# Altium PCB 51单片机密码锁.PcbDoc
Units mm, origin at the board's own origin, x right, y up, seen from the top; angles counter-clockwise.
Board outline 129.41 x 96.52 mm, 2 copper layers (Top Layer, Bottom Layer); 41 components, 45 nets, 193 pads, 0 vias.
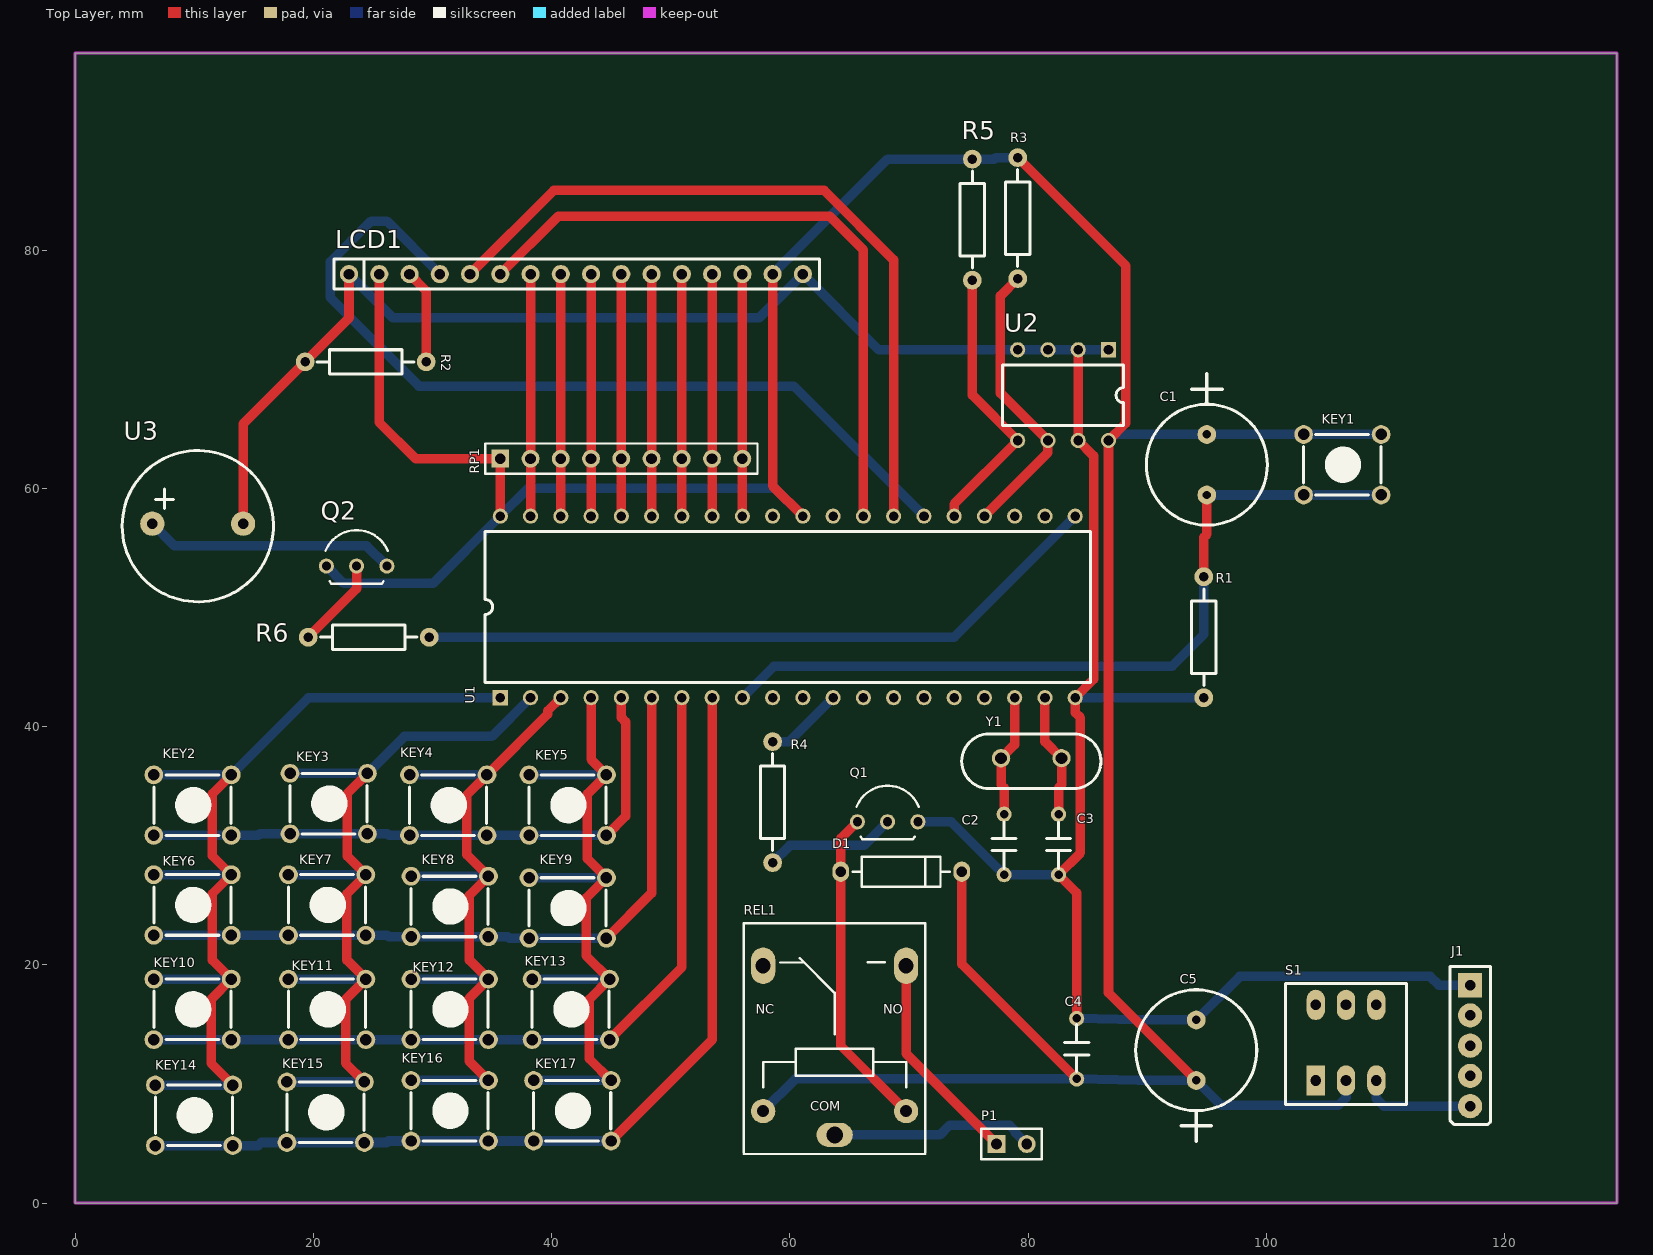
[diagram p0: Top Layer view]
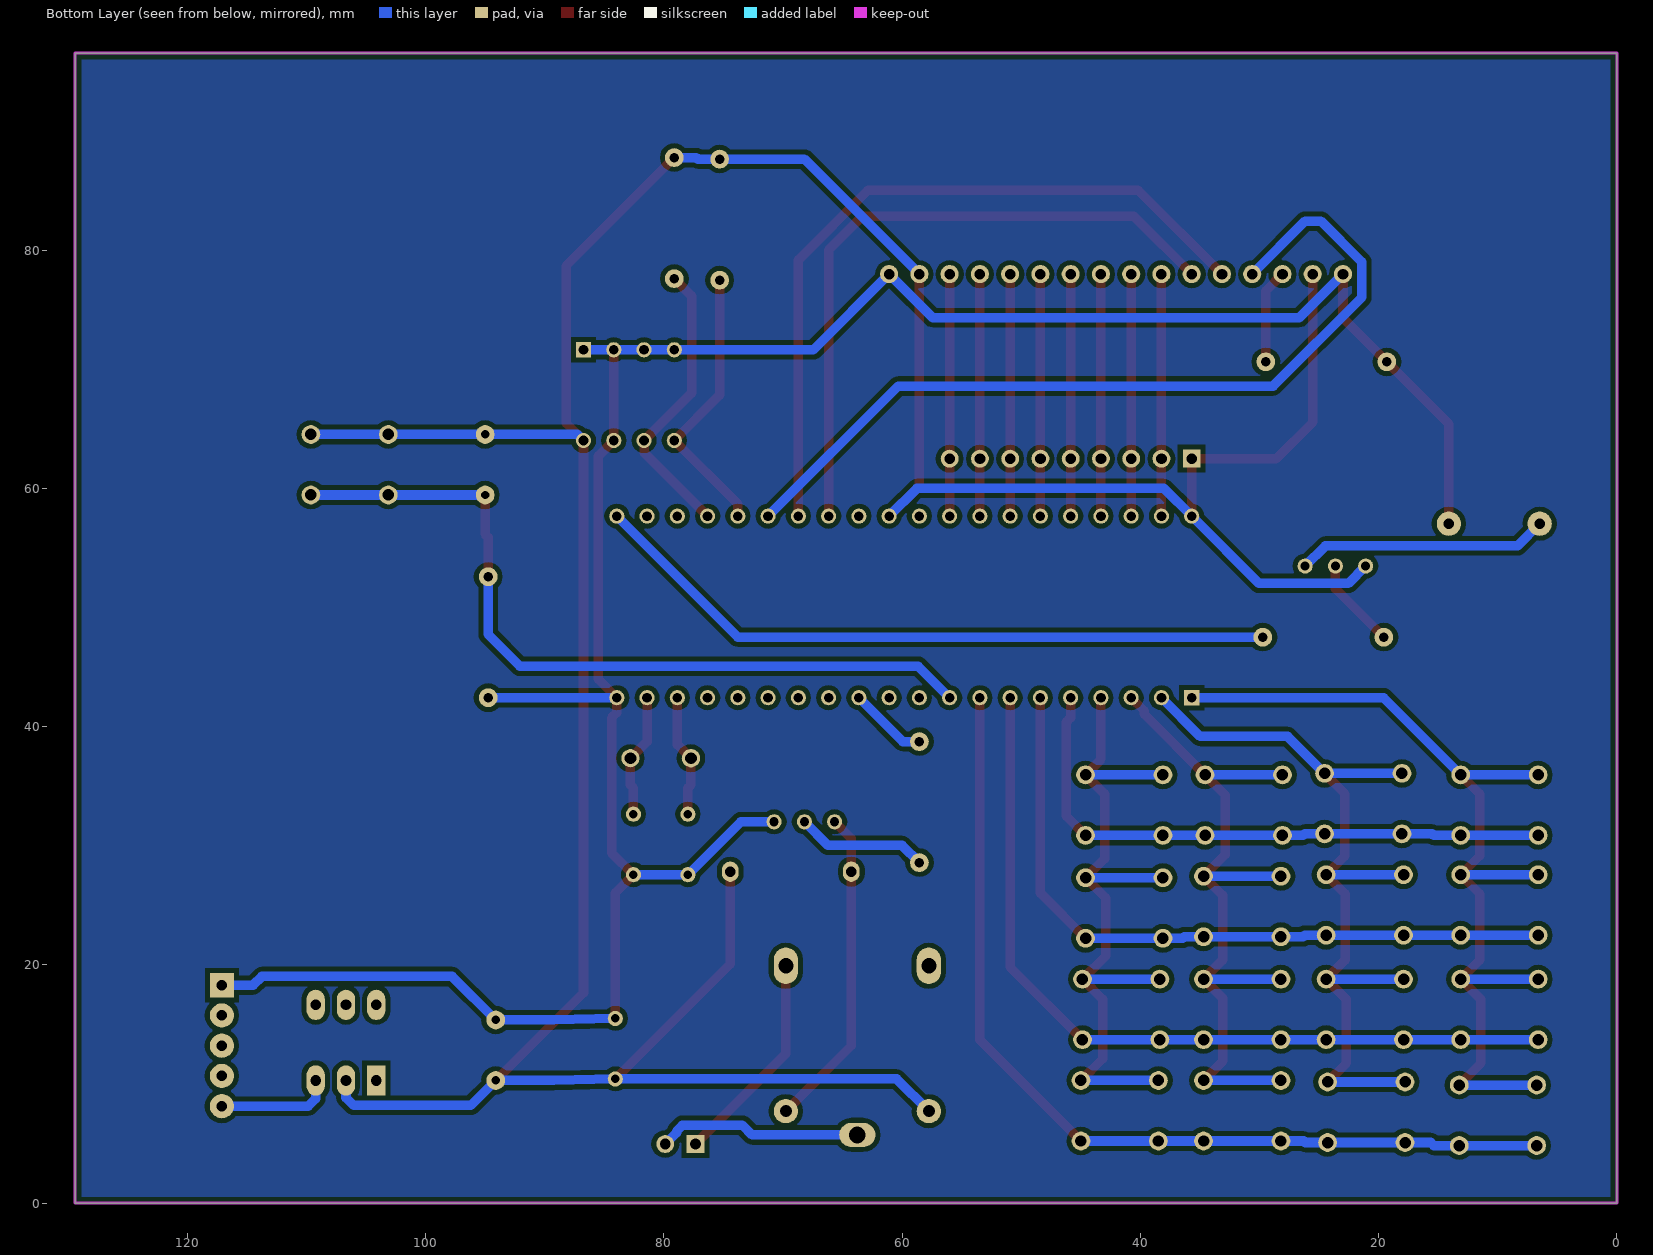
[diagram p1: Bottom Layer view, seen from below]

## Layer stack, top to bottom
Top Layer: signal copper 0.0356
Dielectric: dielectric 0.32, FR-4, Dk 4.8
Bottom Layer: signal copper 0.0356

## Board outline
0,96.524 0,0 129.413,0 129.413,96.524 0,96.524

## Design rules (kind name [scope] priority, off if disabled: settings)
Clearance [All] p1: gap=0.4
PolygonConnect [All] p1: connectstyle=Relief reliefconductorwidth=0.254 reliefentries=4 polygonreliefangle="90 Angle"
RoutingVias [All] p1: holewidth=0.711 width=1.27 viastyle="Through Hole" minholewidth=0.711 minwidth=1.27 maxholewidth=0.711 maxwidth=1.27
SilkscreenOverComponentPads [All] p1: minsilkscreentomaskgap=0.254
SolderMaskExpansion [All] p1: expansion=0.102
Width [All] p1: maxlimit=0.8 minlimit=0.8 preferedwidth=0.8 minimp=50.000000 maximp=50.000000 favimp=50.000000
27 further rules are at their usual default settings.

## Components (designator, comment, footprint, x,y, rotation, side; value= is the part's Value field where it differs from the comment)
C1 "10uF" RB.2/.4 94.996,64.516 r90 top
C2 "30pF" C0.2 77.978,27.559 r90 top
C3 "30pF" C0.2 82.55,27.559 r90 top
C4 "100pF" C0.2 84.074,15.494 r270 top
C5 "100uf" RB.2/.4 94.107,10.287 r270 top
D1 "Diode" DIODE-0.4 64.135,27.94 r0 top
J1 "5P(USB转DIP，供电5V)" 5P 117.094,13.208 r0 top
KEY1 "KEY" KEY 103.124,64.516 r0 top
KEY2 "KEY" KEY 6.604,35.941 r0 top
KEY3 "KEY" KEY 18.034,36.068 r0 top
KEY4 "KEY" KEY 28.067,35.941 r0 top
KEY5 "KEY" KEY 38.1,35.941 r0 top
KEY6 "KEY" KEY 6.604,27.559 r0 top
KEY7 "KEY" KEY 17.907,27.559 r0 top
KEY8 "KEY" KEY 28.194,27.432 r0 top
KEY9 "KEY" KEY 38.1,27.305 r0 top
KEY10 "KEY" KEY 6.604,18.796 r0 top
KEY11 "KEY" KEY 17.907,18.796 r0 top
KEY12 "KEY" KEY 28.194,18.796 r0 top
KEY13 "KEY" KEY 38.354,18.796 r0 top
KEY14 "KEY" KEY 6.731,9.906 r0 top
KEY15 "KEY" KEY 17.78,10.16 r0 top
KEY16 "KEY" KEY 28.194,10.287 r0 top
KEY17 "KEY" KEY 38.481,10.287 r0 top
LCD1 "LCD1602" SIP16 22.987,77.978 r0 top
P1 "Header 2" HDR2X1_A 77.343,4.953 r0 top
Q1 "S8550" TO-92A 68.199,32.004 r0 top
Q2 "S8550" TO-92A 23.622,53.467 r0 top
R1 "5.1k" AXIAL0.4 94.742,42.418 r90 top
R2 "3.3k" AXIAL0.4 19.304,70.612 r0 top
R3 "5.1k" AXIAL0.4 79.121,77.597 r90 top
R4 "100r" AXIAL0.4 58.547,38.735 r270 top
R5 "5.1k" AXIAL0.4 75.311,77.47 r90 top
R6 "100" AXIAL0.4 29.718,47.498 r180 top
REL1 "JQC-3FF" JQC-3FF-1 63.754,5.715 r0 top
RP1 "4.7k(排阻)" SIP9 35.687,62.484 r0 top
S1 "SW4-DIP(自锁开关)" SW6 102.489,8.636 r90 top
U1 "STC89C52" DIP40 35.687,42.418 r90 top
U2 "24CXX" DIP8 86.741,71.628 r270 top
U3 "BELL" BELL 10.287,57.023 r0 top
Y1 "11.0592Mhz" CRYSTAL 82.804,37.338 r180 top

## Footprints (in the part's own frame and the unit in brackets; to place one, negate y for a bottom-side part, rotate by r counter-clockwise, add the part's x,y. Pads: shape width x height; smd on the part's side, far side on the other; paste and mask are expansions set on the pad)
5P [mil]
  rect 80x80 hole 35: 1(0,200)
  round 80 hole 35: 2(0,100) 3(0,0) 4(0,-100) 5(0,-200)
  silkscreen extent -67,-261 68,262
AXIAL0.4 [mil]
  round 62 hole 32: 1(0,0) 2(400,0)
  silkscreen extent 40,-40 360,40
BELL [mil]
  round 80 hole 35 unplated: 1(-150,0) 2(150,0)
  silkscreen extent -250,-258 250,242
C0.2 [mil]
  round 50 hole 28: 1(0,0) 2(200,0)
  silkscreen extent 20,-40 175,40
CRYSTAL [mm]
  round 1.524 hole 1: 1(0,0)
  round 1.542 hole 1: 2(5.08,0)
  silkscreen extent -3.3,-2.03 8.38,2.54
DIODE-0.4 [mm]
  oval 1.4x1.7 hole 0.85: 1(0.127,-0.127) 2(10.287,-0.127)
  silkscreen extent 1.14,-1.4 9.27,1.14
DIP8 [mil]
  rect 50x50 hole 32: 1(0,0)
  round 50 hole 32: 2(0,-100) 3(0,-200) 4(0,-300) 5(300,-300) 6(300,-200) 7(300,-100) 8(300,0)
  silkscreen extent 50,-350 250,50
DIP40 [mil]
  rect 50x50 hole 32: 1(0,0)
  round 50 hole 32: 2(0,-100) 3(0,-200) 4(0,-300) 5(0,-400) 6(0,-500) 7(0,-600) 8(0,-700) 9(0,-800) 10(0,-900) 11(0,-1000) 12(0,-1100) 13(0,-1200) 14(0,-1300) 15(0,-1400) 16(0,-1500) 17(0,-1600) 18(0,-1700) 19(0,-1800) 20(0,-1900) 21(600,-1900) 22(600,-1800) 23(600,-1700) 24(600,-1600) 25(600,-1500) 26(600,-1400) 27(600,-1300) 28(600,-1200) 29(600,-1100) 30(600,-1000) 31(600,-900) 32(600,-800) 33(600,-700) 34(600,-600) 35(600,-500) 36(600,-400) 37(600,-300) 38(600,-200) 39(600,-100) 40(600,0)
  silkscreen extent 50,-1950 550,50
HDR2X1_A [mm]
  rect 1.5x1.5 hole 0.9: 1(0,0)
  round 1.5 hole 0.9: 2(2.54,0)
  silkscreen extent -1.27,-1.27 3.81,1.27
JQC-3FF-1 [mil]
  round 80 hole 40: 1(236.22,78.74) 2(-236.22,78.74)
  oval 120x80 hole 55: 3(0,0)
  oval 80x120 hole 50: 4(236.22,559.05) 5(-236.22,559.05)
  silkscreen extent -300,-63 300,700
KEY [mil]
  round 62 hole 38: 1(0,0) 1(255.91,0) 2(0,-200) 2(255.91,-200)
  silkscreen extent 0,-200 255,0
RB.2/.4 [mil]
  round 62 hole 28: 1(0,0) 2(-200,0)
  silkscreen extent -300,-200 200,200
SIP9 [mm]
  rect 1.5x1.5 hole 0.9: 1(0,0)
  round 1.5 hole 0.9: 2(2.54,0) 3(5.08,0) 4(7.62,0) 5(10.16,0) 6(12.7,0) 7(15.24,0) 8(17.78,0) 9(20.32,0)
  silkscreen extent -1.27,-1.27 21.59,1.27
SIP16 [mil]
  round 60 hole 35: 1(0,0) 2(100,0) 3(200,0) 4(300,0) 5(400,0) 6(500,0) 7(600,0) 8(700,0) 9(800,0) 10(900,0) 11(1000,0) 12(1100,0) 13(1200,0) 14(1300,0) 15(1400,0) 16(1500,0)
  silkscreen extent -50,-50 1555,50
SW6 [mil]
  rect 100x60 hole 35: 1(65,-65)
  oval 100x60 hole 35: 2(65,-165) 3(65,-265) 4(315,-265) 5(315,-165) 6(315,-65)
  silkscreen extent -15,-365 385,35
TO-92A [mil]
  round 50 hole 30: 1(-100,0) 2(0,0) 3(100,0)
  silkscreen extent -103,-58 103,119

## Part data
C1 C5: library part CAPPOL
Y1: library part XTAL

## Nets (pads, with @x,y where several pads share a name; then routed paths per layer and width w, separated by ;. In a path a pad name is that pad's centre, name@x,y a point inside that pad or via, vN(x,y) a via of type N, cw(c..) or ccw(c..) an arc to the next point about the centre after c; other vN are vias at no path point)
D0: LCD1.7 RP1.2 U1.39 | length 20.3
  Top Layer w0.8: U1.39 RP1.2 LCD1.7
D1: LCD1.8 RP1.3 U1.38 | length 20.3
  Top Layer w0.8: U1.38 RP1.3 LCD1.8
D2: LCD1.9 RP1.4 U1.37 | length 20.3
  Top Layer w0.8: U1.37 RP1.4 LCD1.9
D3: LCD1.10 RP1.5 U1.36 | length 20.3
  Top Layer w0.8: U1.36 RP1.5 LCD1.10
D4: LCD1.11 RP1.6 U1.35 | length 20.3
  Top Layer w0.8: U1.35 RP1.6 LCD1.11
D5: LCD1.12 RP1.7 U1.34 | length 20.3
  Top Layer w0.8: U1.34 RP1.7 LCD1.12
D6: LCD1.13 RP1.8 U1.33 | length 20.3
  Top Layer w0.8: U1.33 RP1.8 LCD1.13
D7: LCD1.14 RP1.9 U1.32 | length 20.3
  Top Layer w0.8: U1.32 RP1.9 LCD1.14
GND: C2.1 C3.1 C4.1 C5.2 J1.1 LCD1.1 LCD1.16 Q1.3 R1.1 R2.1 U1.20 U2.1 U2.2 U2.3 U2.4 U2.7 U3.2 | length 212.2
  Top Layer w0.8: U3.2 14.097,65.405 R2.1 22.987,74.295 LCD1.1 ; C4.1 84.074,26.035 C3.1 84.379,29.388 84.379,40.742 83.947,41.173 U1.20 85.496,43.967 85.496,62.713 U2.7 U2.2
  Bottom Layer w0.8: LCD1.1 26.645,74.32 57.429,74.32 LCD1.16 67.437,71.628 U2.4 U2.3 U2.2 U2.1 ; Q1.3 73.533,32.004 C2.1 C3.1 ; U1.20 R1.1 ; C4.1 89.23,15.367 C5.2 97.765,19.025 113.741,19.025 114.478,18.288 J1.1
NetC1_2: C1.2 KEY1.2 R1.2 U1.9 | length 67.4
  Top Layer w0.8: R1.2 94.742,55.88 94.996,56.134 C1.2
  Bottom Layer w0.8: U1.9 58.649,45.06 92.075,45.06 94.742,47.727 R1.2 ; C1.2 103.124,59.436 KEY1.2@109.624,59.436
NetC2_2: C2.2 U1.18 Y1.2 | length 10.4
  Top Layer w0.8: C2.2 77.978,34.849 77.724,35.103 Y1.2 78.867,38.481 U1.18
NetC3_2: C3.2 U1.19 Y1.1 | length 10.5
  Top Layer w0.8: U1.19 81.407,38.735 Y1.1 82.804,35.103 82.55,34.849 C3.2
NetD1_1: D1.1 Q1.1 REL1.1 | length 27.1
  Top Layer w0.8: Q1.1 64.262,30.607 D1.1 64.262,13.207 REL1.1
NetJ1_5: J1.5 S1.3 | length 9.7
  Bottom Layer w0.8: S1.3 109.22,8.763 109.855,8.128 J1.5
NetLCD1_3: LCD1.3 R2.2 | length 7.9
  Top Layer w0.8: LCD1.3 29.464,76.581 R2.2
NetP1_1: P1.1 REL1.4 | length 18.1
  Top Layer w0.8: REL1.4 69.754,12.542 P1.1
NetP1_2: P1.2 REL1.3 | length 17.2
  Bottom Layer w0.8: REL1.3 72.593,5.715 73.406,6.528 78.435,6.528 78.918,6.045 78.918,5.918 P1.2
NetQ1_2: Q1.2 R4.2 | length 11.1
  Bottom Layer w0.8: R4.2 59.995,30.023 66.218,30.023 Q1.2
NetQ2_2: Q2.2 R6.2 | length 7.7
  Top Layer w0.8: R6.2 23.622,51.562 Q2.2
NetQ2_3: Q2.3 U3.1 | length 21.2
  Bottom Layer w0.8: U3.1 8.331,55.169 24.46,55.169 Q2.3
P10: KEY2.1 KEY6.1 KEY10.1 KEY14.1 U1.1 | length 81.4
  Top Layer w0.8: KEY2.1@13.104,35.941 11.506,34.343 11.506,29.157 13.104,27.559 11.506,25.961 11.506,20.394 13.104,18.796 11.405,17.097 11.405,11.732 KEY14.1@13.231,9.906
  Bottom Layer w0.8: KEY10.1@6.604,18.796 KEY10.1@13.104,18.796 ; KEY6.1@6.604,27.559 KEY6.1@13.104,27.559 ; KEY2.1@6.604,35.941 13.104,35.941 19.581,42.418 U1.1 ; KEY14.1@6.731,9.906 KEY14.1@13.231,9.906
P11: KEY3.1 KEY7.1 KEY11.1 KEY15.1 U1.2 | length 72.3
  Top Layer w0.8: KEY15.1@24.28,10.16 22.708,11.732 22.708,17.097 24.407,18.796 22.809,20.394 22.809,25.961 24.407,27.559 22.835,29.131 22.835,34.369 KEY3.1@24.534,36.068
  Bottom Layer w0.8: KEY15.1@17.78,10.16 KEY15.1@24.28,10.16 ; KEY11.1@17.907,18.796 KEY11.1@24.407,18.796 ; KEY7.1@17.907,27.559 KEY7.1@24.407,27.559 ; KEY3.1@18.034,36.068 24.534,36.068 27.633,39.167 34.976,39.167 U1.2
P12: KEY4.1 KEY8.1 KEY12.1 KEY16.1 U1.3 | length 64.8
  Top Layer w0.8: KEY16.1@34.694,10.287 33.096,11.885 33.096,17.198 34.694,18.796 33.096,20.394 33.096,25.834 34.694,27.432 32.868,29.258 32.868,34.242 34.567,35.941 39.675,41.049 39.675,41.326 U1.3
  Bottom Layer w0.8: KEY4.1@28.067,35.941 KEY4.1@34.567,35.941 ; KEY16.1@28.194,10.287 KEY16.1@34.694,10.287 ; KEY12.1@28.194,18.796 KEY12.1@34.694,18.796 ; KEY8.1@28.194,27.432 KEY8.1@34.694,27.432
P13: KEY5.1 KEY9.1 KEY13.1 KEY17.1 U1.4 | length 63
  Top Layer w0.8: U1.4 43.307,37.234 44.6,35.941 43.002,34.343 43.002,28.903 44.6,27.305 42.901,25.606 42.901,20.749 44.854,18.796 43.155,17.097 43.155,12.113 KEY17.1@44.981,10.287
  Bottom Layer w0.8: KEY9.1@38.1,27.305 KEY9.1@44.6,27.305 ; KEY5.1@38.1,35.941 KEY5.1@44.6,35.941 ; KEY13.1@38.354,18.796 KEY13.1@44.854,18.796 ; KEY17.1@38.481,10.287 KEY17.1@44.981,10.287
P14: KEY2.2 KEY3.2 KEY4.2 KEY5.2 U1.5 | length 50.5
  Top Layer w0.8: KEY5.2@44.6,30.861 46.203,32.464 46.203,40.386 45.847,40.742 U1.5
  Bottom Layer w0.8: KEY2.2@6.604,30.861 13.104,30.861 15.377,30.861 15.504,30.988 18.034,30.988 24.534,30.988 26.213,30.988 26.34,30.861 28.067,30.861 34.567,30.861 38.1,30.861 KEY5.2@44.6,30.861
P15: KEY6.2 KEY7.2 KEY8.2 KEY9.2 U1.6 | length 59.9
  Top Layer w0.8: KEY9.2@44.6,22.225 48.387,26.012 U1.6
  Bottom Layer w0.8: KEY6.2@6.604,22.479 13.104,22.479 17.907,22.479 24.407,22.479 26.213,22.479 26.34,22.352 28.194,22.352 34.694,22.352 36.322,22.352 36.449,22.225 38.1,22.225 KEY9.2@44.6,22.225
P16: KEY10.2 KEY11.2 KEY12.2 KEY13.2 U1.7 | length 69.5
  Top Layer w0.8: KEY13.2@44.854,13.716 50.927,19.789 U1.7
  Bottom Layer w0.8: KEY10.2@6.604,13.716 13.104,13.716 17.907,13.716 24.407,13.716 28.194,13.716 34.694,13.716 38.354,13.716 KEY13.2@44.854,13.716
P17: KEY14.2 KEY15.2 KEY16.2 KEY17.2 U1.8 | length 79.1
  Top Layer w0.8: KEY17.2@44.981,5.207 53.467,13.693 U1.8
  Bottom Layer w0.8: KEY14.2@6.731,4.826 13.231,4.826 15.367,4.826 15.621,5.08 17.78,5.08 24.28,5.08 26.162,5.08 26.289,5.207 28.194,5.207 34.694,5.207 38.481,5.207 KEY17.2@44.981,5.207
P20: R6.1 U1.21 | length 58.4
  Bottom Layer w0.8: R6.1 73.787,47.498 U1.21
P21: U1.22
P22: U1.23
P23: R3.1 U1.24 U2.6 | length 24.4
  Top Layer w0.8: U1.24 81.661,62.992 U2.6 77.673,67.996 77.673,76.149 R3.1
P24: R5.1 U1.25 U2.5 | length 23.6
  Top Layer w0.8: U1.25 73.787,58.674 U2.5 75.311,67.818 R5.1
P25: LCD1.4 U1.26 | length 72.9
  Bottom Layer w0.8: LCD1.4 26.162,82.423 24.841,82.423 21.412,78.994 21.412,76.022 28.854,68.58 60.325,68.58 U1.26
P26: LCD1.5 U1.27 | length 62.4
  Top Layer w0.8: LCD1.5 40.183,85.014 62.865,85.014 68.707,79.172 U1.27
P27: LCD1.6 U1.28 | length 56
  Top Layer w0.8: LCD1.6 40.538,82.829 63.348,82.829 66.167,80.01 U1.28
P30: U1.10
P31: U1.11
P32: R4.1 U1.12 | length 6.6
  Bottom Layer w0.8: R4.1 59.944,38.735 U1.12
P33: U1.13
P34: U1.14
P35: U1.15
P36: U1.16
P37: U1.17
VCC: C1.1 C4.2 C5.1 D1.2 KEY1.1 LCD1.2 LCD1.15 Q2.1 R3.2 R5.2 REL1.2 RP1.1 S1.2 U1.30 U1.40 U2.8 | length 301.6
  Top Layer w0.8: LCD1.2 25.527,65.532 28.575,62.484 RP1.1 U1.40 ; LCD1.15 58.547,60.198 U1.30 ; D1.2 74.422,20.066 C4.2 ; R3.2 88.189,78.689 88.189,65.456 U2.8 86.741,17.653 C5.1
  Bottom Layer w0.8: Q2.1 22.53,52.019 30.048,52.019 U1.40 38.024,59.995 58.75,59.995 U1.30 ; REL1.2 60.453,10.414 C4.2 89.23,10.287 C5.1 96.19,8.204 106.045,8.204 106.68,8.839 S1.2 ; LCD1.15 68.199,87.63 R5.2 77.14,87.63 77.267,87.757 R3.2 ; U2.8 87.249,64.516 C1.1 103.124,64.516 KEY1.1@109.624,64.516
pads on no net: J1.2 J1.3 J1.4 REL1.5 S1.1 S1.4 S1.5 S1.6 U1.29 U1.31

## Polygon pours and split planes (outlines as drawn)
no net on Bottom Layer "Top Layer-No Net" (solid, pour order 2): 0,96.524 0,0 129.413,0 129.413,96.524 0,96.524

## Keep-outs
Keep-Out Layer:
  the board outline again, w0.254

## Text inside footprints (layer, text, board x,y; h text height)
REL1: Top Overlay "NC" at 57.15,15.875 h0.8; Top Overlay "NO" at 67.818,15.875 h0.8; Top Overlay "COM" at 61.722,7.747 h0.8